# EAGLE board mainboard (EAGLE 9.6.2), part 1 of 2
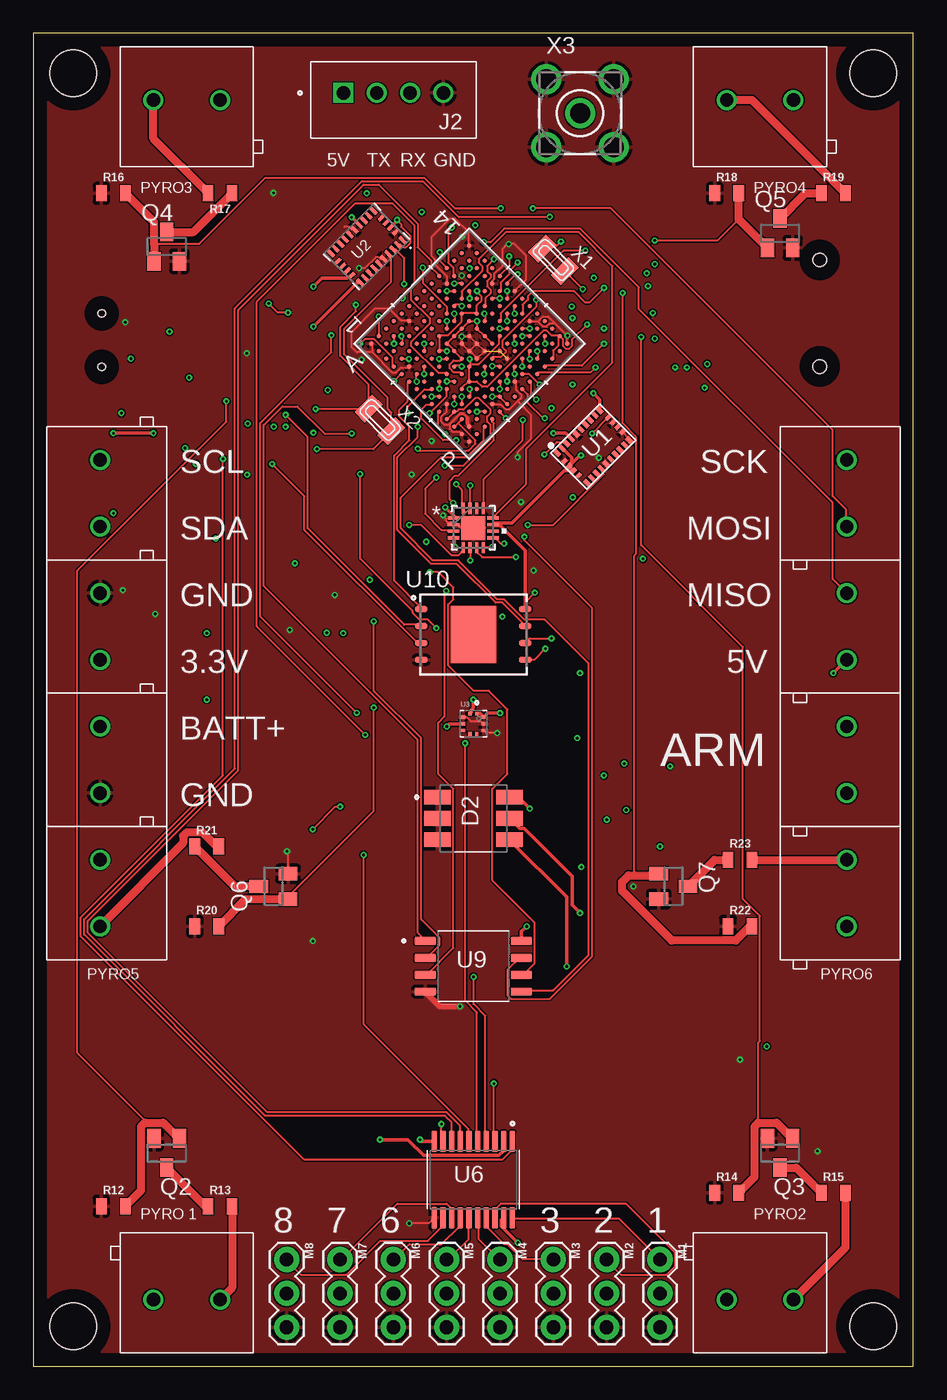
[diagram p0: board, top side]
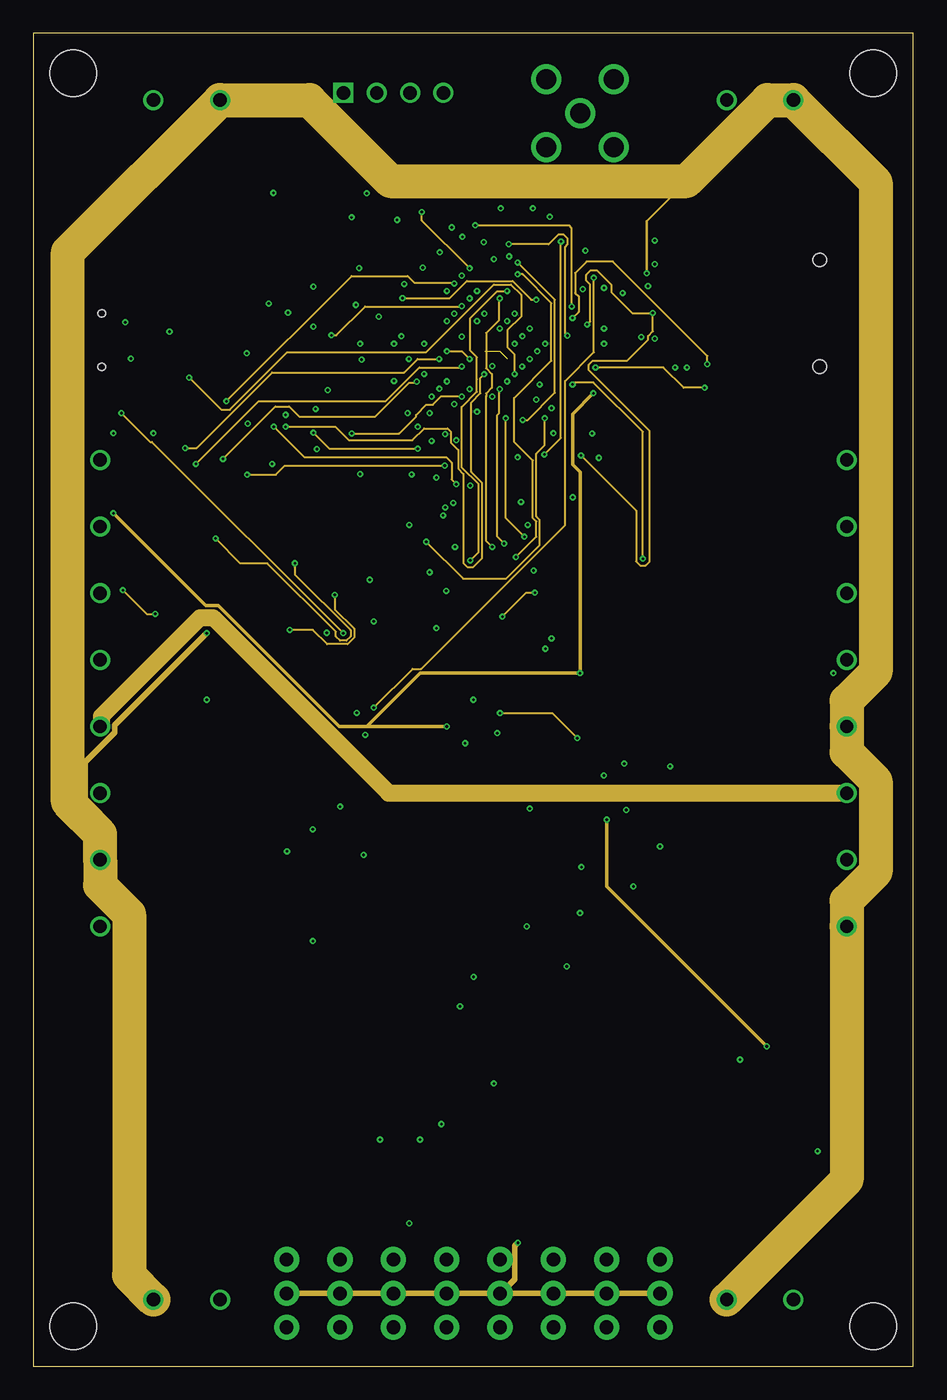
[diagram p1: board, inner layer Route2]
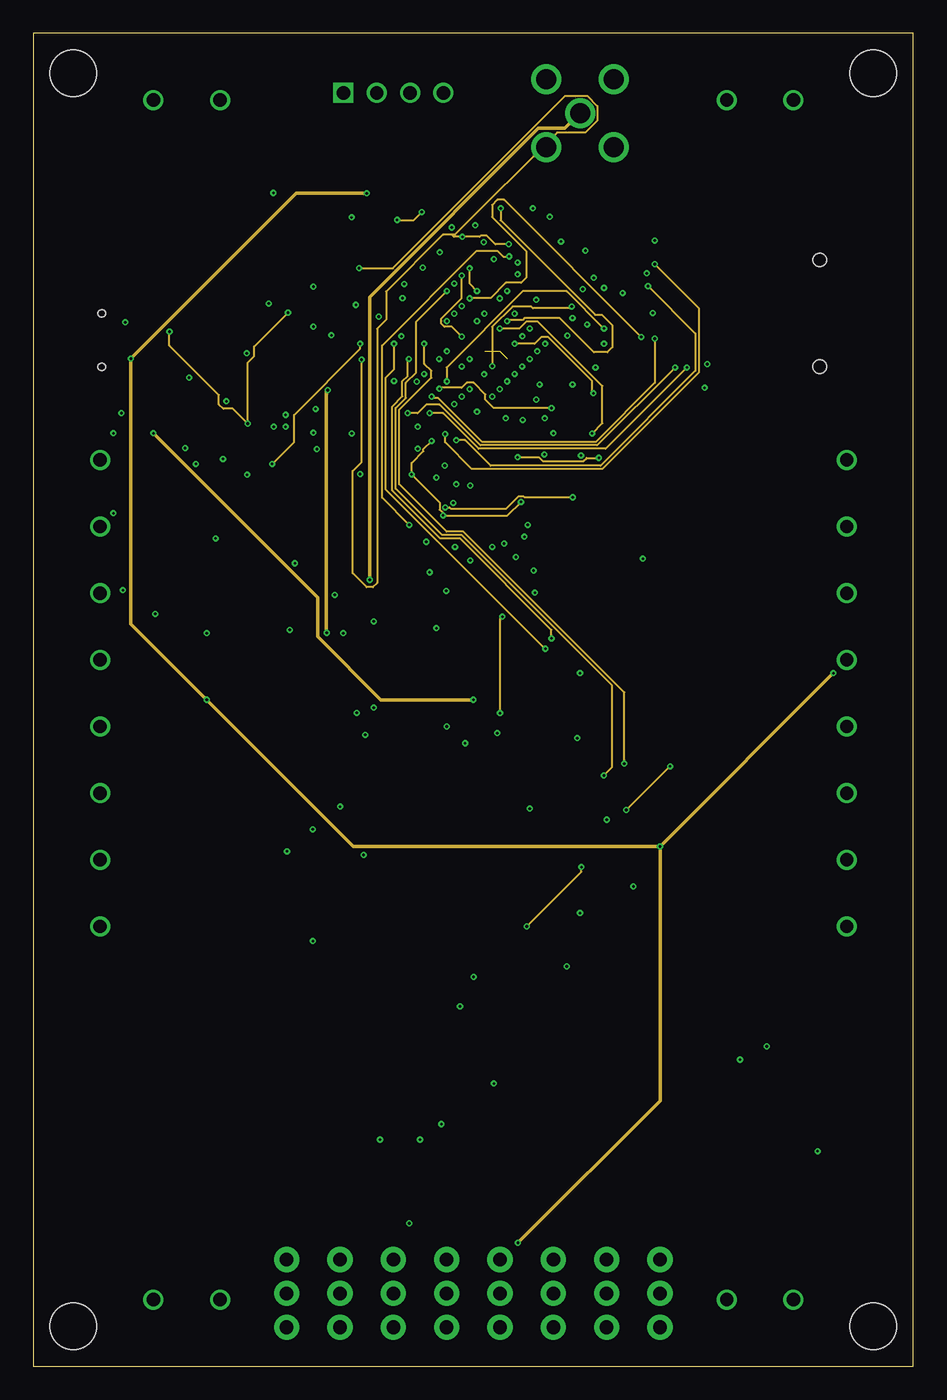
[diagram p2: board, inner layer Route15]
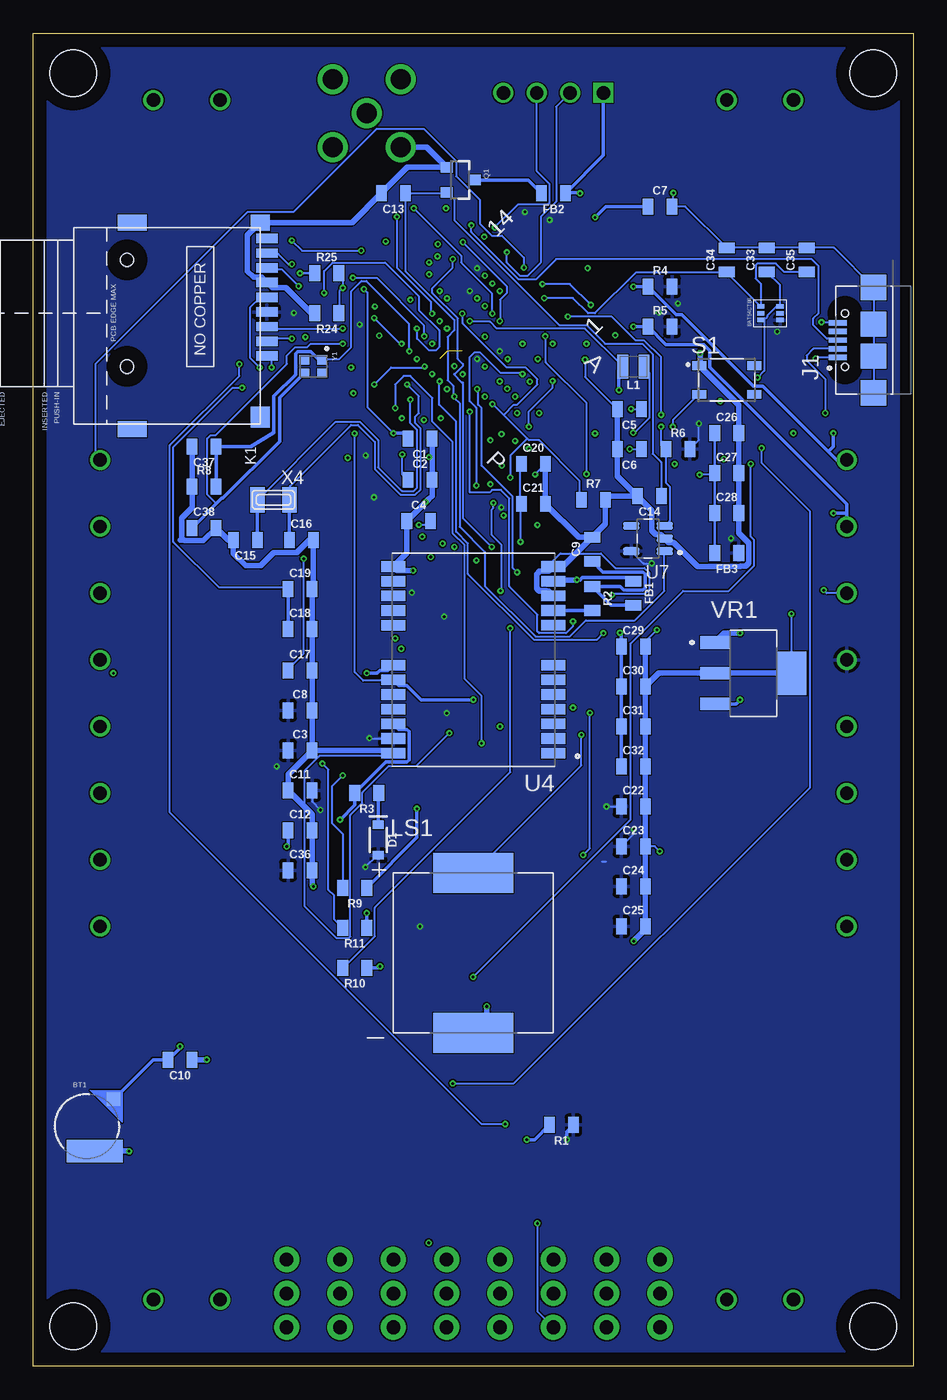
[diagram p3: board, bottom side, seen from below]

Size 66 x 100 mm. Coordinates in mm from the lower left corner, seen from the top.
Outline: 0,0 66,0 66,100 0,100 0,0
Copper layers (1+2*15+16): Top 0.035mm / dielectric 1.5mm / Route2 0.035mm / dielectric 0.15mm / Route15 0.035mm / dielectric 0.2mm / Bottom 0.035mm
Design rules "default *": minimum track width 4mil, minimum drill 0.2mm, track to track 4mil, track to pad 4mil, pad to pad 4mil, via to via 4mil, smd to smd 4mil, copper to edge 40mil, drill to drill 4mil, minimum pad ring 7mil, minimum via ring 5mil, stop-mask expansion 4mil, vias tented up to drill 0.3mm, thermal gap 10mil
Holes 3.5 mm at 3,97 63,97 3,3 63,3

## Footprints (pad centres in the part's own frame; a part is rotated, then mirrored left to right if it is on the bottom)
ML414H_IV01E = smd 1 x 1: + 2.022,2.032 | smd 4.2 x 1.7: - 0.6,-1.85
0805 = smd 0.8 x 1.2: 1 -0.9,0; 2 0.9,0
SOD-323 = smd 0.63 x 0.83: A 1.15,0; C -1.15,0
LED_BL-HBXJXGX32L = smd 2 x 1.1: 1 -2.7,1.6; 2 -2.7,0; 3 -2.7,-1.6; 4 2.7,-1.6; 5 2.7,0; 6 2.7,1.6
CUI_UJ2-MIBH-G-SMT-TR = smd 0.4 x 1.35: 1 -1.3,2.675; 2 -0.65,2.675; 3 0,2.675; 4 0.65,2.675; 5 1.3,2.675 | smd 1.9 x 1.9: S1 -3.95,0; S2 -1.2,0; S3 1.2,0; S4 3.95,0 | hole 0.55: -2,2.15; 2,2.15
JST_B4B-XH-A(LF)(SN) = drill 1 square: 1 3.75,-0.525 | drill 1: 2 1.25,-0.525; 3 -1.25,-0.525; 4 -3.75,-0.525
112J-TDAR-R01 = smd 0.7 x 1.6: 1 7.2,10.5; 2 6.1,10.5; 3 5,10.5; 4 3.9,10.5; 5 2.8,10.5; 6 1.7,10.5; 7 0.6,10.5; 8 -0.5,10.5; CD -1.6,10.5 | smd 1.2 x 1.4: G -2.8,10 | smd 1.6 x 1.4: P$10 11.8,10 | smd 1.2 x 2.2: P$11 -2.8,0.4; P$12 12.7,0.4 | hole 1: 0,0; 8,0
0805-WIDE = smd 0.8 x 1.8: 1 -0.8,0; 2 0.8,0
XDCR_SMTB-1240-S-R = smd 6 x 3: N 0,-6; P 0,6
1X03 = drill 1.016 pad 1.88: 1 0,0; 2 2.54,0; 3 5.08,0
SOT23-3 = smd 0.8 x 0.9: 1 -0.95,-1; 2 0.95,-1; 3 0,1.1
SOT23 = smd 1 x 1.4: 1 -0.95,-1.1; 2 0.95,-1.1; 3 0,1.1
SW_SKRPACE010 = smd 1.05 x 0.65: 1 -2.075,1.075; 2 2.075,1.075; 3 -2.075,-1.075; 4 2.075,-1.075
LGA28R50P4X10_380X520X100 = smd 0.3 x 0.525: 1 -2.25,1.562; 6 -2.25,-1.562; 7 -1.75,-1.562; 8 -1.25,-1.562; 9 -0.75,-1.562; 10 -0.25,-1.562; 11 0.25,-1.562; 12 0.75,-1.562; 13 1.25,-1.562; 14 1.75,-1.562; 15 2.25,-1.562; 20 2.25,1.562; 21 1.75,1.562; 22 1.25,1.562; 23 0.75,1.562; 24 0.25,1.562; 25 -0.25,1.562; 26 -0.75,1.562; 27 -1.25,1.562; 28 -1.75,1.562 | smd 0.425 x 0.3: 2 -2.312,0.75; 3 -2.312,0.25; 4 -2.312,-0.25; 5 -2.312,-0.75; 16 2.312,-0.75; 17 2.312,-0.25; 18 2.312,0.25; 19 2.312,0.75
IC_BNO085 = smd 0.25 x 0.675: 1 -2.25,1.562; 6 -2.25,-1.562; 7 -1.75,-1.562; 8 -1.25,-1.562; 9 -0.75,-1.562; 10 -0.25,-1.562; 11 0.25,-1.562; 12 0.75,-1.562; 13 1.25,-1.562; 14 1.75,-1.562; 15 2.25,-1.562; 20 2.25,1.562; 21 1.75,1.562; 22 1.25,1.562; 23 0.75,1.562; 24 0.25,1.562; 25 -0.25,1.562; 26 -0.75,1.562; 27 -1.25,1.562; 28 -1.75,1.562 | smd 0.575 x 0.25: 2 -2.312,0.75; 3 -2.312,0.25; 4 -2.312,-0.25; 5 -2.312,-0.75; 16 2.312,-0.75; 17 2.312,-0.25; 18 2.312,0.25; 19 2.312,0.75
XDCR_BMP390L = smd 0.25 x 0.275: 1 0.25,0.762; 2 -0.25,0.762; 6 -0.25,-0.762; 7 0.25,-0.762 | smd 0.275 x 0.25: 3 -0.762,0.5; 4 -0.762,0; 5 -0.762,-0.5; 8 0.762,-0.5; 9 0.762,0; 10 0.762,0.5
XCVR_NEO-M9N-00B = smd 1.8 x 0.8: 1 -6,7; 2 -6,5.9; 3 -6,4.8; 4 -6,3.7; 5 -6,2.6; 6 -6,1.5; 7 -6,0.4; 8 -6,-2.6; 9 -6,-3.7; 10 -6,-4.8; 11 -6,-5.9; 12 -6,-7; 13 6,-7; 14 6,-5.9; 15 6,-4.8; 16 6,-3.7; 17 6,-2.6; 18 6,0.4; 19 6,1.5; 20 6,2.6; 21 6,3.7; 22 6,4.8; 23 6,5.9; 24 6,7
BGA196_MIMXRT_NXP = smd 0.356 x 0.356: A1 -5.201,5.201; A2 -4.401,5.201; A3 -3.6,5.201; A4 -2.8,5.201; A5 -2,5.201; A6 -1.2,5.201; A7 -0.4,5.201; A8 0.4,5.201; A9 1.2,5.201; A10 2,5.201; A11 2.8,5.201; A12 3.6,5.201; A13 4.401,5.201; A14 5.201,5.201; B1 -5.201,4.401; B2 -4.401,4.401; B3 -3.6,4.401; B4 -2.8,4.401; B5 -2,4.401; B6 -1.2,4.401; B7 -0.4,4.401; B8 0.4,4.401; B9 1.2,4.401; B10 2,4.401; B11 2.8,4.401; B12 3.6,4.401; B13 4.401,4.401; B14 5.201,4.401; C1 -5.201,3.6; C2 -4.401,3.6; C3 -3.6,3.6; C4 -2.8,3.6; C5 -2,3.6; C6 -1.2,3.6; C7 -0.4,3.6; C8 0.4,3.6; C9 1.2,3.6; C10 2,3.6; C11 2.8,3.6; C12 3.6,3.6; C13 4.401,3.6; C14 5.201,3.6; D1 -5.201,2.8; D2 -4.401,2.8; D3 -3.6,2.8; D4 -2.8,2.8; D5 -2,2.8; D6 -1.2,2.8; D7 -0.4,2.8; D8 0.4,2.8; D9 1.2,2.8; D10 2,2.8; D11 2.8,2.8; D12 3.6,2.8; D13 4.401,2.8; D14 5.201,2.8; E1 -5.201,2; E2 -4.401,2; E3 -3.6,2; E4 -2.8,2; E5 -2,2; E6 -1.2,2; E7 -0.4,2; E8 0.4,2; E9 1.2,2; E10 2,2; E11 2.8,2; E12 3.6,2; E13 4.401,2; E14 5.201,2; F1 -5.201,1.2; F2 -4.401,1.2; F3 -3.6,1.2; F4 -2.8,1.2; F5 -2,1.2; F6 -1.2,1.2; F7 -0.4,1.2; F8 0.4,1.2; F9 1.2,1.2; F10 2,1.2; F11 2.8,1.2; F12 3.6,1.2; F13 4.401,1.2; F14 5.201,1.2; G1 -5.201,0.4; G2 -4.401,0.4; G3 -3.6,0.4; G4 -2.8,0.4; G5 -2,0.4; G6 -1.2,0.4; G7 -0.4,0.4; G8 0.4,0.4; G9 1.2,0.4; G10 2,0.4; G11 2.8,0.4; G12 3.6,0.4; G13 4.401,0.4; G14 5.201,0.4; H1 -5.201,-0.4; H2 -4.401,-0.4; H3 -3.6,-0.4; H4 -2.8,-0.4; H5 -2,-0.4; H6 -1.2,-0.4; H7 -0.4,-0.4; H8 0.4,-0.4; H9 1.2,-0.4; H10 2,-0.4; H11 2.8,-0.4; H12 3.6,-0.4; H13 4.401,-0.4; H14 5.201,-0.4; J1 -5.201,-1.2; J2 -4.401,-1.2; J3 -3.6,-1.2; J4 -2.8,-1.2; J5 -2,-1.2; J6 -1.2,-1.2; J7 -0.4,-1.2; J8 0.4,-1.2; J9 1.2,-1.2; J10 2,-1.2; J11 2.8,-1.2; J12 3.6,-1.2; J13 4.401,-1.2; J14 5.201,-1.2; K1 -5.201,-2; K2 -4.401,-2; K3 -3.6,-2; K4 -2.8,-2; K5 -2,-2; K6 -1.2,-2; K7 -0.4,-2; K8 0.4,-2; K9 1.2,-2; K10 2,-2; K11 2.8,-2; K12 3.6,-2; K13 4.401,-2; K14 5.201,-2; L1 -5.201,-2.8; L2 -4.401,-2.8; L3 -3.6,-2.8; L4 -2.8,-2.8; L5 -2,-2.8; L6 -1.2,-2.8; L7 -0.4,-2.8; L8 0.4,-2.8; L9 1.2,-2.8; L10 2,-2.8; L11 2.8,-2.8; L12 3.6,-2.8; L13 4.401,-2.8; L14 5.201,-2.8; M1 -5.201,-3.6; M2 -4.401,-3.6; M3 -3.6,-3.6; M4 -2.8,-3.6; M5 -2,-3.6; M6 -1.2,-3.6; M7 -0.4,-3.6; M8 0.4,-3.6; M9 1.2,-3.6; M10 2,-3.6; M11 2.8,-3.6; M12 3.6,-3.6; M13 4.401,-3.6; M14 5.201,-3.6; N1 -5.201,-4.401; N2 -4.401,-4.401; N3 -3.6,-4.401; N4 -2.8,-4.401; N5 -2,-4.401; N6 -1.2,-4.401; N7 -0.4,-4.401; N8 0.4,-4.401; N9 1.2,-4.401; N10 2,-4.401; N11 2.8,-4.401; N12 3.6,-4.401; N13 4.401,-4.401; N14 5.201,-4.401; P1 -5.201,-5.201; P2 -4.401,-5.201; P3 -3.6,-5.201; P4 -2.8,-5.201; P5 -2,-5.201; P6 -1.2,-5.201; P7 -0.4,-5.201; P8 0.4,-5.201; P9 1.2,-5.201; P10 2,-5.201; P11 2.8,-5.201; P12 3.6,-5.201; P13 4.401,-5.201; P14 5.201,-5.201
SOP65P640X120-20N = smd 1.57 x 0.41: 1 -2.87,2.925; 2 -2.87,2.275; 3 -2.87,1.625; 4 -2.87,0.975; 5 -2.87,0.325; 6 -2.87,-0.325; 7 -2.87,-0.975; 8 -2.87,-1.625; 9 -2.87,-2.275; 10 -2.87,-2.925; 11 2.87,-2.925; 12 2.87,-2.275; 13 2.87,-1.625; 14 2.87,-0.975; 15 2.87,-0.325; 16 2.87,0.325; 17 2.87,0.975; 18 2.87,1.625; 19 2.87,2.275; 20 2.87,2.925
SOT95P280X145-5N = smd 1.21 x 0.59: 1 -1.255,0.95; 2 -1.255,0; 3 -1.255,-0.95; 4 1.255,-0.95; 5 1.255,0.95
QFN-16_3X3X0.65_NXP-M = smd 0.856 x 0.249: 1 -1.478,0.75; 2 -1.478,0.25; 3 -1.478,-0.25; 4 -1.478,-0.75; 9 1.478,-0.75; 10 1.478,-0.25; 11 1.478,0.25; 12 1.478,0.75 | smd 0.249 x 0.856: 5 -0.75,-1.478; 6 -0.25,-1.478; 7 0.25,-1.478; 8 0.75,-1.478; 13 0.75,1.478; 14 0.25,1.478; 15 -0.25,1.478; 16 -0.75,1.478 | smd 1.8 x 1.8: 17 0,0
SOIC127P790X216-8N = smd 1.61 x 0.58: 1 -3.605,1.905; 2 -3.605,0.635; 3 -3.605,-0.635; 4 -3.605,-1.905; 5 3.605,-1.905; 6 3.605,-0.635; 7 3.605,0.635; 8 3.605,1.905
SON127P800X600X80-9N = smd 0.94 x 0.44: 1 -3.895,1.905; 2 -3.895,0.635; 3 -3.895,-0.635; 4 -3.895,-1.905; 5 3.895,-1.905; 6 3.895,-0.635; 7 3.895,0.635; 8 3.895,1.905 | smd 3.4 x 4.3: 9 0,0
BAT54CTB6 = smd 0.34 x 0.55: P$1 -0.5,0; P$2 0,0; P$3 0.5,0; P$4 0.5,1.45; P$5 0,1.45; P$6 -0.5,1.45
AK100 = drill 1: P$1 0,0; P$2 5,0
VREG_LM7805MPX/NOPB = smd 2.15 x 0.95: 1 -2.9,2.3; 2 -2.9,0; 3 -2.9,-2.3 | smd 2.15 x 3.25: 4 2.9,0
XTAL3215 = smd 1.1 x 1.9: P$1 1.2,0; P$2 -1.2,0
LTI-SASF54GT = drill 1.5 pad 2.2: 1 0,0; 2 -2.54,2.54; 3 2.54,2.54; 4 2.54,-2.54; 5 -2.54,-2.54
OSC_XRCGB24M000F3M00R0 = smd 0.7 x 0.75: 1 -0.5,0.675; 2 -0.5,-0.675; 3 0.5,-0.675; 4 0.5,0.675

## Placement (x,y rotation side)
BT1  RELOWABLE_BATTERY_ML414H  [ML414H_IV01E]  62,18 0 bottom
C1  22pF  [0805]  37,69.6 180 bottom
C2  22pF  [0805]  37,66.5 0 bottom
C3  0.1uF  [0805]  46,46.2 0 bottom
C4  0.1uF  [0805]  37.1,63.4 0 bottom
C5  22pF  [0805]  21.3,71.8 180 bottom
C6  22pF  [0805]  21.3,68.8 180 bottom
C7  0.1uF  [0805]  19,87 0 bottom
C8  0.1uF  [0805]  46,49.2 0 bottom
C9  47pF  [0805]  24.1,61.3 90 bottom
C10  1.0uF  [0805]  55,23 180 bottom
C11  0.1uF  [0805]  46,43.2 0 bottom
C12  0.1uF  [0805]  46,40.2 0 bottom
C13  0.22uF  [0805]  39,88 180 bottom
C14  0.22uF  [0805]  19.8,65.3 180 bottom
C15  20pF  [0805]  50.1,62 180 bottom
C16  20pF  [0805]  45.9,62 0 bottom
C17  0.22uF  [0805]  46,52.2 0 bottom
C18  0.22uF  [0805]  46,55.3 0 bottom
C19  4.7uF  [0805]  46,58.3 0 bottom
C20  0.22uF  [0805]  28.5,67.7 0 bottom
C21  4.7uF  [0805]  28.5,64.7 0 bottom
C22  10nF  [0805]  21,42 0 bottom
C23  0.22uF  [0805]  21,39 0 bottom
C24  4.7uF  [0805]  21,36 0 bottom
C25  2.2uF  [0805]  21,33 0 bottom
C26  0.22uF  [0805]  14,70 0 bottom
C27  4.7uF  [0805]  14,67 0 bottom
C28  10uF  [0805]  14,64 0 bottom
C29  10uF  [0805]  21,54 0 bottom
C30  4.7uF  [0805]  21,51 0 bottom
C31  0.22uF  [0805]  21,48 0 bottom
C32  10nF  [0805]  21,45 0 bottom
C33  0.22uF  [0805]  11,83 90 bottom
C34  0.22uF  [0805]  14,83 90 bottom
C35  10uF  [0805]  8,83 90 bottom
C36  0.22uF  [0805]  46,37.2 0 bottom
C37  12pF  [0805]  53.2,69 180 bottom
C38  12pF  [0805]  53.2,62.9 0 bottom
D1  0.5A/40V/420mV  [SOD-323]  40.13,39.47 270 bottom
D2  BL-HBXJXGX32L  [LED_BL-HBXJXGX32L]  33,41.1 0 top
FB1  120Ω  [0805]  21,58 270 bottom
FB2  120Ω  [0805]  27,88 180 bottom
FB3  120Ω  [0805]  14,61 180 bottom
J1  UJ2-MIBH-G-SMT-TR  [CUI_UJ2-MIBH-G-SMT-TR]  2.98,76.98 90 bottom
J2  B4B-XH-A(LF)(SN)  [JST_B4B-XH-A(LF)(SN)]  27,95 180 top
K1  112J-TDAR-R01  [112J-TDAR-R01]  58.98,83 270 bottom
L1  4.7uH  [0805-WIDE]  21,75 180 bottom
LS1  SMTB-1240-S-R  [XDCR_SMTB-1240-S-R]  33,31 0 bottom
M1  SERVO  [1X03]  47,8 270 top
M2  SERVO  [1X03]  43,8 270 top
M3  SERVO  [1X03]  39,8 270 top
M4  SERVO  [1X03]  35,8 270 top
M5  SERVO  [1X03]  31,8 270 top
M6  SERVO  [1X03]  27,8 270 top
M7  SERVO  [1X03]  23,8 270 top
M8  SERVO  [1X03]  19,8 270 top
Q1  MOSFET-PCHANNEL  [SOT23-3]  34,89 270 bottom
Q2  IRLML6344TRPBF  [SOT23]  10,16 180 top
Q3  IRLML6344TRPBF  [SOT23]  56,16 180 top
Q4  IRLML6344TRPBF  [SOT23]  10,84 0 top
Q5  IRLML6344TRPBF  [SOT23]  56,85 0 top
Q6  IRLML6344TRPBF  [SOT23]  18,36 90 top
Q7  IRLML6344TRPBF  [SOT23]  48,36 270 top
R1  10k  [0805]  26.4,18.1 180 bottom
R2  33  [0805]  24.1,57.6 270 bottom
R3  1k  [0805]  41,43 180 bottom
R4  2.2k  [0805]  19,81 0 bottom
R5  2.2k  [0805]  19,78 0 bottom
R6  100k  [0805]  17.66,68.81 0 bottom
R7  100k  [0805]  24,65 0 bottom
R8  2.2M  [0805]  53.2,66 0 bottom
R9  1  [0805]  41.9,35.9 180 bottom
R10  5  [0805]  41.9,29.9 180 bottom
R11  65  [0805]  41.9,32.9 180 bottom
R12  470  [0805]  6,12 0 top
R13  1  [0805]  14,12 0 top
R14  470  [0805]  52,13 0 top
R15  1  [0805]  60,13 0 top
R16  470  [0805]  6,88 0 top
R17  1  [0805]  14,88 180 top
R18  470  [0805]  52,88 0 top
R19  1  [0805]  60,88 0 top
R20  470  [0805]  13,33 0 top
R21  1  [0805]  13,39 0 top
R22  470  [0805]  53,33 0 top
R23  1  [0805]  53,38 0 top
R24  722  [0805]  44,79 180 bottom
R25  1700  [0805]  44,82 0 bottom
S1  SKRPACE010  [SW_SKRPACE010]  14,74 0 bottom
U1  BNO055  [LGA28R50P4X10_380X520X100]  42,69 45 top
U2  BNO085  [IC_BNO085]  25,84 225 top
U3  BMP390L  [XDCR_BMP390L]  33,48.2 0 top
U4  NEO-M9N-00B  [XCVR_NEO-M9N-00B]  33,53 180 bottom
U5  MIMXRT1062DVJ6B  [BGA196_MIMXRT_NXP]  32.71,76.71 45 top
U6  TXB0108PWRG4  [SOP65P640X120-20N]  33,14 270 top
U7  TLV75533PDBVR  [SOT95P280X145-5N]  19.9,62.1 180 bottom
U8  MKL02Z32VFG4QFN-16_3X3X0.65_NXP-M  [QFN-16_3X3X0.65_NXP-M]  33,62.9 0 top
U9  W25Q64JVSSIM  [SOIC127P790X216-8N]  33,30 0 top
U10  W25N01GVZEIG_TR  [SON127P800X600X80-9N]  33,54.9 0 top
U$1  BAT54CTB6  [BAT54CTB6]  10,79 90 bottom
U$2  AK100  [AK100]  52,5 0 top
U$3  AK100  [AK100]  14,95 180 top
U$4  AK100  [AK100]  57,95 180 top
U$5  AK100  [AK100]  5,38 270 top
U$6  AK100  [AK100]  61,33 90 top
U$7  AK100  [AK100]  5,68 270 top
U$8  AK100  [AK100]  9,5 0 top
U$9  AK100  [AK100]  61,63 90 top
U$10  AK100  [AK100]  61,53 90 top
U$11  AK100  [AK100]  5,58 270 top
U$12  AK100  [AK100]  5,48 270 top
U$13  AK100  [AK100]  61,43 90 top
VR1  LM7805MPX/NOPB  [VREG_LM7805MPX/NOPB]  12,52 0 bottom
X1  [XTAL3215]  39,83 135 top
X2  [XTAL3215]  26,71 135 top
X3  LTI-SASF54GT  [LTI-SASF54GT]  41,94 0 top
X4  [XTAL3215]  48,65 180 bottom
Y1  XRCGB24M000F3M00R0  [OSC_XRCGB24M000F3M00R0]  45,75 270 bottom

## Library data of the parts
BT1 = SparkFun-Batteries; PROD_ID: BATT-14267
C1-C38 = SparkFun-Capacitors; PROD_ID: CAP-08064
D1 = SparkFun-DiscreteSemi; PROD_ID: DIO-10955
D2 = BL-HBXJXGX32L; AVAILABILITY: In Stock; CHECK_PRICES: https://www.snapeda.com/parts/BL-HBXJXGX32L/American+Bright+Optoelectronics/view-part/?ref=eda; DESCRIPTION: Red, Green, Blue (RGB) 625nm Red, 525nm Green, 568nm Blue LED Indication - Discrete 2V Red, 3.2V Green, 3.3V Blue 6-SMD, J-Lead; MF: American Bright Optoelectronics Corporation; MP: BL-HBXJXGX32L; PACKAGE: SMD-6 American Bright Optoelectronics; PRICE: None; SNAPEDA_LINK: https://www.snapeda.com/parts/BL-HBXJXGX32L/American+Bright+Optoelectronics/view-part/?ref=snap
FB1-FB3 = SparkFun-Coils; PROD_ID: NDUC-10201
J1 = UJ2-MIBH-G-SMT-TR; AVAILABILITY: In Stock; CHECK_PRICES: https://www.snapeda.com/parts/UJ2-MIBH-G-SMT-TR/Same+Sky/view-part/?ref=eda; DESCRIPTION: Micro B, USB 2.0, 480 Mbps, 5 Vdc, 1.8 A, Right Angle, Surface Mount, Black Insulator, USB Receptacle; MF: Same Sky; MP: UJ2-MIBH-G-SMT-TR; PACKAGE: None; PRICE: None; SNAPEDA_LINK: https://www.snapeda.com/parts/UJ2-MIBH-G-SMT-TR/Same+Sky/view-part/?ref=snap
J2 = B4B-XH-A_LF__SN_; AVAILABILITY: In Stock; CHECK_PRICES: https://www.snapeda.com/parts/B4B-XH-A%20(LF)(SN)/JST/view-part/?ref=eda; DESCRIPTION: Connector Header Through Hole 4 position 0.098 (2.50mm); MF: JST Sales; MP: B4B-XH-A (LF)(SN); PACKAGE: None; PRICE: None; SNAPEDA_LINK: https://www.snapeda.com/parts/B4B-XH-A%20(LF)(SN)/JST/view-part/?ref=snap
K1 = 112J-TDAR-R01; AVAILABILITY: In Stock; CHECK_PRICES: https://www.snapeda.com/parts/112J-TDAR-R01/Attend/view-part/?ref=eda; DESCRIPTION: 9 (8 + 1) Position Card Connector Secure Digital - microSD™ Surface Mount, Right Angle Gold; MF: Attend; MP: 112J-TDAR-R01; PACKAGE: None; PRICE: None; SNAPEDA_LINK: https://www.snapeda.com/parts/112J-TDAR-R01/Attend/view-part/?ref=snap
L1 = SparkFun-Coils; PROD_ID: NDUC-14234
LS1 = SMTB-1240-S-R; AVAILABILITY: In Stock; CHECK_PRICES: https://www.snapeda.com/parts/SMTB-1240-S-R/PUI+Audio/view-part/?ref=eda; DESCRIPTION: 12X12MM TRANSDUCER 4000HZ 75DB; MF: PUI Audio; MP: SMTB-1240-S-R; PACKAGE: Package; PRICE: None; SNAPEDA_LINK: https://www.snapeda.com/parts/SMTB-1240-S-R/PUI+Audio/view-part/?ref=snap
M1-M8 = SparkFun-Electromechanical
Q1 = User-Submitted; PROD_ID: TRANS-08285
Q2-Q7 = IRLML6344TRPBF; AVAILABILITY: In Stock; CHECK_PRICES: https://www.snapeda.com/parts/IRLML6344TRPBF/Infineon/view-part/?ref=eda; DESCRIPTION: IRLML6344TRPBF N-channel MOSFET Transistor, 5 A, 30 V, 3-Pin SOT-23 | Infineon IRLML6344TRPBF; MF: Infineon Technologies; MP: IRLML6344TRPBF; PACKAGE: SOT-23-3 ON Semiconductor; PRICE: None; SNAPEDA_LINK: https://www.snapeda.com/parts/IRLML6344TRPBF/Infineon/view-part/?ref=snap
R1-R25 = SparkFun-Resistors; PROD_ID: RES-11622
S1 = SKRPACE010; AVAILABILITY: In Stock; CHECK_PRICES: https://www.snapeda.com/parts/SKRPACE010/ALPS/view-part/?ref=eda; DESCRIPTION: Switch Tactile N.O. SPST Button J-Bend 0.05A 16VDC 2.55N SMD Automotive T/R; MF: ALPS; MP: SKRPACE010; PACKAGE: None; PRICE: None; SNAPEDA_LINK: https://www.snapeda.com/parts/SKRPACE010/ALPS/view-part/?ref=snap
U1 = BNO055; AVAILABILITY: In Stock; CHECK_PRICES: https://www.snapeda.com/parts/BNO055/Bosch/view-part/?ref=eda; DESCRIPTION: BNO055 series Accelerometer, Gyroscope, Magnetometer, 3 Axis Sensor Evaluation Board; MF: Bosch; MP: BNO055; PACKAGE: LGA-28 Bosch; PRICE: None; SNAPEDA_LINK: https://www.snapeda.com/parts/BNO055/Bosch/view-part/?ref=snap
U2 = BNO085; AVAILABILITY: In Stock; CHECK_PRICES: https://www.snapeda.com/parts/BNO085/CEVA+Technologies%252C+Inc./view-part/?ref=eda; DESCRIPTION: Accelerometer, Gyroscope, Magnetometer, 9 Axis Sensor I2C, SPI, UART Output; MF: CEVA Technologies, Inc.; MP: BNO085; PACKAGE: None; PRICE: None; SNAPEDA_LINK: https://www.snapeda.com/parts/BNO085/CEVA+Technologies%252C+Inc./view-part/?ref=snap
U3 = BMP390L; AVAILABILITY: In Stock; CHECK_PRICES: https://www.snapeda.com/parts/BMP390L/Bosch/view-part/?ref=eda; DESCRIPTION: Pressure Sensor Development Tools Evaluation Shuttle Board for the BMP390L; MF: Bosch Sensortec; MP: BMP390L; PACKAGE: None; PRICE: None; SNAPEDA_LINK: https://www.snapeda.com/parts/BMP390L/Bosch/view-part/?ref=snap
U4 = NEO-M9N-00B; AVAILABILITY: In Stock; CHECK_PRICES: https://www.snapeda.com/parts/NEO-M9N-00B/u-blox/view-part/?ref=eda; DESCRIPTION: series RF Receiver BeiDou, Galileo, GLONASS, GNSS, GPS - -167dBm - - Module; MF: u-blox; MP: NEO-M9N-00B; PACKAGE: SMD-24 u-blox; PRICE: None; SNAPEDA_LINK: https://www.snapeda.com/parts/NEO-M9N-00B/u-blox/view-part/?ref=snap
U5 = MIMXRT1062DVJ6B; COPYRIGHT: Copyright (C) 2025 Ultra Librarian. All rights reserved.; MANUFACTURER_PART_NUMBER: MIMXRT1062DVJ6B; MFR_NAME: NXP
U6 = TXB0108PWRG4; AVAILABILITY: In Stock; CHECK_PRICES: https://www.snapeda.com/parts/TXB0108PWRG4/Texas+Instruments/view-part/?ref=eda; DESCRIPTION: 8-Bit Bidirectional Voltage-Level Shifter with Auto Direction Sensing and +/-15-kV ESD Protect 20-TSSOP -40 to 85; MF: Texas Instruments; MP: TXB0108PWRG4; PACKAGE: TSSOP-20 Texas Instruments; PRICE: None; SNAPEDA_LINK: https://www.snapeda.com/parts/TXB0108PWRG4/Texas+Instruments/view-part/?ref=snap
U7 = TLV75533PDBVR; AVAILABILITY: In Stock; CHECK_PRICES: https://www.snapeda.com/parts/TLV75533PDBVR/Texas+Instruments/view-part/?ref=eda; DESCRIPTION: 500-mA high-PSRR low-IQ low-dropout voltage regulator with enable; MF: Texas Instruments; MP: TLV75533PDBVR; PACKAGE: SOT-23-5 Texas Instruments; PRICE: None; SNAPEDA_LINK: https://www.snapeda.com/parts/TLV75533PDBVR/Texas+Instruments/view-part/?ref=snap
U8 = MKL02Z32VFG4; COPYRIGHT: Copyright (C) 2025 Ultra Librarian. All rights reserved.; MANUFACTURER_PART_NUMBER: MKL02Z32VFG4; MFR_NAME: NXP
U9 = W25Q64JVSSIM; AVAILABILITY: In Stock; CHECK_PRICES: https://www.snapeda.com/parts/W25Q64JVSSIM/Winbond/view-part/?ref=eda; DESCRIPTION: FLASH - NOR Memory IC 64Mb (8M x 8) SPI - Quad I/O 133 MHz 8-SOIC; MF: Winbond Electronics; MP: W25Q64JVSSIM; PACKAGE: SOIC-8 Winbond Electronics; PRICE: None; SNAPEDA_LINK: https://www.snapeda.com/parts/W25Q64JVSSIM/Winbond/view-part/?ref=snap
U10 = W25N01GVZEIG_TR; AVAILABILITY: In Stock; CHECK_PRICES: https://www.snapeda.com/parts/W25N01GVZEIG%20TR/Winbond/view-part/?ref=eda; DESCRIPTION: FLASH - NAND Memory IC 1Gb (128M x 8) SPI 104 MHz 8-WSON (8x6); MF: Winbond Electronics; MP: W25N01GVZEIG TR; PACKAGE: WSON-8 Winbond; PRICE: None; SNAPEDA_LINK: https://www.snapeda.com/parts/W25N01GVZEIG%20TR/Winbond/view-part/?ref=snap
U$1 = BAT54CTB6
U$2-U$13 = Terminal Blocks
VR1 = LM7805MPX_NOPB; AVAILABILITY: In Stock; CHECK_PRICES: https://www.snapeda.com/parts/LM7805MPX/NOPB/Texas+Instruments/view-part/?ref=eda; DESCRIPTION: 1.5-A, 30-V, linear voltage regulator; MF: Texas Instruments; MP: LM7805MPX/NOPB; PACKAGE: SOT-223-4 Texas Instruments; PRICE: None; SNAPEDA_LINK: https://www.snapeda.com/parts/LM7805MPX/NOPB/Texas+Instruments/view-part/?ref=snap
X1 X2 X4 = adafruit
X3 = con-coax; OC_FARNELL: unknown; OC_NEWARK: unknown
Y1 = XRCGB24M000F3M00R0; AVAILABILITY: In Stock; CHECK_PRICES: https://www.snapeda.com/parts/XRCGB24M000F3M00R0/Murata+Electronics+North+America/view-part/?ref=eda; DESCRIPTION: 24 MHz ±30ppm Crystal 6pF 150 Ohms 4-SMD, No Lead; MF: Murata Electronics; MP: XRCGB24M000F3M00R0; PACKAGE: SMD-4 Murata; PRICE: None; SNAPEDA_LINK: https://www.snapeda.com/parts/XRCGB24M000F3M00R0/Murata+Electronics+North+America/view-part/?ref=snap

## Nets
3.3V: C3.1 C8.1 C11.2 C22.1 C23.1 C24.1 C25.1 C36.1 D1.A FB3.1 K1.4 R1.1 R4.2 R5.2 R6.2 U1.3 U1.4 U1.28 U2.3 U2.28 U3.1 U3.10 U4.23 U5.E6 U5.E9 U5.F5 U5.F10 U5.J6 U5.J10 U5.K4 U5.K5 U5.N14 U5.P12 U6.2 U7.5 U8.1 U8.11 U9.8 U10.8 U$1.P$1 U$11.P$2
5V: C12.1 FB2.1 J1.1 J2.1 M1.2 M2.2 M3.2 M4.2 M5.2 M6.2 M7.2 M8.2 U6.19 U$10.P$1 VR1.3
12V: R25.1 U$2.P$1 U$3.P$1 U$4.P$1 U$5.P$1 U$6.P$1 U$8.P$1 U$13.P$2 VR1.1
BATT+: U$12.P$1 U$13.P$1
BUZZER: LS1.P U5.H4
FLASH1-CLK: U5.L4 U9.6
FLASH1-CS: U5.L3 U9.1
FLASH1-D0: U5.P3 U9.5
FLASH1-D1: U5.N4 U9.2
FLASH1-D2: U5.P4 U9.3
FLASH1-D3: U5.P5 U9.7
FLASH2-CLK: U5.D2 U10.6
FLASH2-CS: U5.F1 U10.1
FLASH2-D0: U5.B3 U10.5
FLASH2-D1: U5.A2 U10.2
FLASH2-D2: U5.D1 U10.3
FLASH2-D3: U5.E1 U10.7
GND: BT1.- C1.1 C2.2 C3.2 C4.1 C5.2 C6.2 C7.2 C8.2 C9.2 C10.1 C11.1 C12.2 C13.2 C14.2 C15.2 C16.2 C17.2 C18.2 C19.2 C20.2 C21.2 C22.2 C23.2 C24.2 C25.2 C26.2 C27.2 C28.2 C29.2 C30.2 C31.2 C32.2 C33.2 C34.2 C35.2 C36.2 C37.2 C38.2 D2.1 D2.2 D2.3 J1.5 J1.S1 J1.S2 J1.S3 J1.S4 J2.4 K1.6 K1.G LS1.N M1.3 M2.3 M3.3 M4.3 M5.3 M6.3 M7.3 M8.3 Q1.1 Q2.2 Q3.2 Q4.2 Q5.2 Q6.2 Q7.2 R7.2 R8.1 R12.1 R14.1 R16.1 R18.1 R20.1 R22.1 R24.2 S1.1 U1.2 U1.10 U1.15 U1.16 U1.18 U1.25 U2.2 U2.10 U2.25 U3.3 U3.8 U3.9 U4.10 U4.12 U4.13 U4.24 U5.A1 U5.A14 U5.B5 U5.B10 U5.E2 U5.E13 U5.G7 U5.G8 U5.G14 U5.H7 U5.H8 U5.J7 U5.J8 U5.K2 U5.K9 U5.K13 U5.L9 U5.N1 U5.N2 U5.N5 U5.N8 U5.P1 U5.P14 U6.11 U7.2 U8.2 U8.17 U9.4 U10.4 U$11.P$1 U$12.P$2 VR1.2 VR1.4 X3.2 X3.3 X3.4 X3.5
GPIO_AD_B0__01: U5.H10
GPIO_B1_05: U5.D12
GPIO_B1_14: U5.C14
GPIO_EMC_24: U5.D3
GPSBATT: BT1.+ C10.2 R3.2 U4.22
GPSINT: U4.4
GPSRST: U4.8
LED-BLUE: R9.2 U5.C10
LED-GREEN: R10.2 U5.C3
LED-RED: R11.2 U5.E4
MISO: U5.E7 U$10.P$2
MOSI: U5.E8 U$9.P$1
N$1: C2.1 U1.27 X1.P$1
N$2: C1.2 U1.26 X1.P$2
N$3: C4.2 U1.9
N$4: C5.1 U2.27 X2.P$1
N$5: C6.1 U2.26 X2.P$2
N$6: C7.1 U2.9
N$8: FB1.1 U4.11 X3.1
N$9: R2.2 U4.9
N$10: C9.1 FB1.2 R2.1
N$11: D1.C R3.1
N$12: C16.1 U5.N9 X4.P$2
N$13: R6.1 U5.K7 U7.3
N$14: M8.1 U6.12
N$15: M7.1 U6.13
N$16: M6.1 U6.14
N$17: M5.1 U6.15
N$18: M1.1 U6.20
N$19: M2.1 U6.18
N$20: M3.1 U6.17
N$21: M4.1 U6.16
N$22: R1.2 U6.10
N$23: J1.2 U5.M8
N$24: J1.3 U5.L8
N$25: FB2.2 Q1.3
N$26: C15.1 U5.P9 X4.P$1
N$27: C13.1 C14.1 Q1.2 U5.N6 U5.P6 U7.1
N$28: C26.1 C27.1 C28.1 FB3.2 U5.L1 U5.L2
N$29: L1.1 U5.M1 U5.M2
N$30: C29.1 C30.1 C31.1 C32.1 L1.2 U5.F6 U5.F7 U5.F8 U5.F9 U5.G6 U5.G9 U5.H6 U5.H9 U5.J5 U5.J9
N$31: C17.1 U5.M10
N$32: C20.1 C21.1 U5.P8
N$33: C18.1 C19.1 U5.P10
N$34: S1.3 U8.16
N$35: C37.1 R8.2 U5.N11 Y1.1
N$36: C38.1 U5.P11 Y1.3
N$37: D2.6 R9.1
N$38: D2.4 R10.1
N$39: D2.5 R11.1
N$41: Q2.3 R13.1
N$42: R13.2 U$8.P$2
N$44: Q3.3 R15.1
N$45: R15.2 U$2.P$2
N$47: Q4.3 R17.1
N$48: R17.2 U$3.P$2
N$50: Q5.3 R19.1
N$51: R19.2 U$4.P$2
N$53: Q6.3 R21.1
N$54: R21.2 U$5.P$2
N$56: Q7.3 R23.1
N$57: R23.2 U$6.P$2
PTA1: U5.F3 U8.15
PTA3: R7.1 U5.G10 U5.K3 U8.3
PTA4: U5.F11 U8.4
PTA5: U5.E14 U8.5
PTA6: U5.G13 U8.6
PTA7: U5.F14 U8.7
PTB0: U5.F12 U8.8
PTB1: U5.M7 U8.9
PTB4: U5.D10 U8.12
PTB5: U5.F13 U8.13
PYRO1: Q2.1 R12.2 U5.C11
PYRO2: Q3.1 R14.2 U5.D11
PYRO3: Q4.1 R16.2 U5.H12
PYRO4: Q5.1 R18.2 U5.H11
PYRO5: Q6.1 R20.2 U5.L12
PYRO6: Q7.1 R22.2 U5.K12
R-RX: J2.3 U5.B11
R-TX: J2.2 U5.A11
RX1: U5.G11
SCK: U5.D8 U$9.P$2
SCL: R4.1 U1.19 U2.19 U3.2 U4.19 U5.J11 U$7.P$1
SD-CLK: K1.5 U5.J3
SD-CMD: K1.3 U5.J4
SD-DAT0: K1.7 U5.J1
SD-DAT1: K1.8 U5.K1
SD-DAT2: K1.1 U5.H2
SD-DAT3: K1.2 U5.J2
SDA: R5.1 U1.20 U2.20 U3.4 U4.18 U5.K11 U$7.P$2
SERVO1: U5.F2 U6.1
SERVO2: U5.G5 U6.3
SERVO3: U5.H5 U6.4
SERVO4: U5.H3 U6.5
SERVO5: U5.D9 U6.6
SERVO6: U5.A10 U6.7
SERVO7: U5.H13 U6.8
SERVO8: U5.M13 U6.9
TX1: U5.M11
V_USB: U4.7
VDD_SNVS_IN: C33.1 U5.M9 U$1.P$3 U$1.P$6
VDD_USB_CAP: C34.1 C35.1 U5.K8 U$1.P$4
VOLTAGE: R24.1 R25.2 U5.J13